# Altium PCB FPGA_DB.PcbDoc (part 4 of 5)
Units mil, origin at the board's own origin, x right, y up, seen from the top; angles counter-clockwise.
Board outline 5980 x 6510 mil, 4 copper layers (Top, Ground Plane, Power Plane, Bottom), stack 61.497 mil thick; 140 components, 246 nets, 1021 pads, 2685 vias.
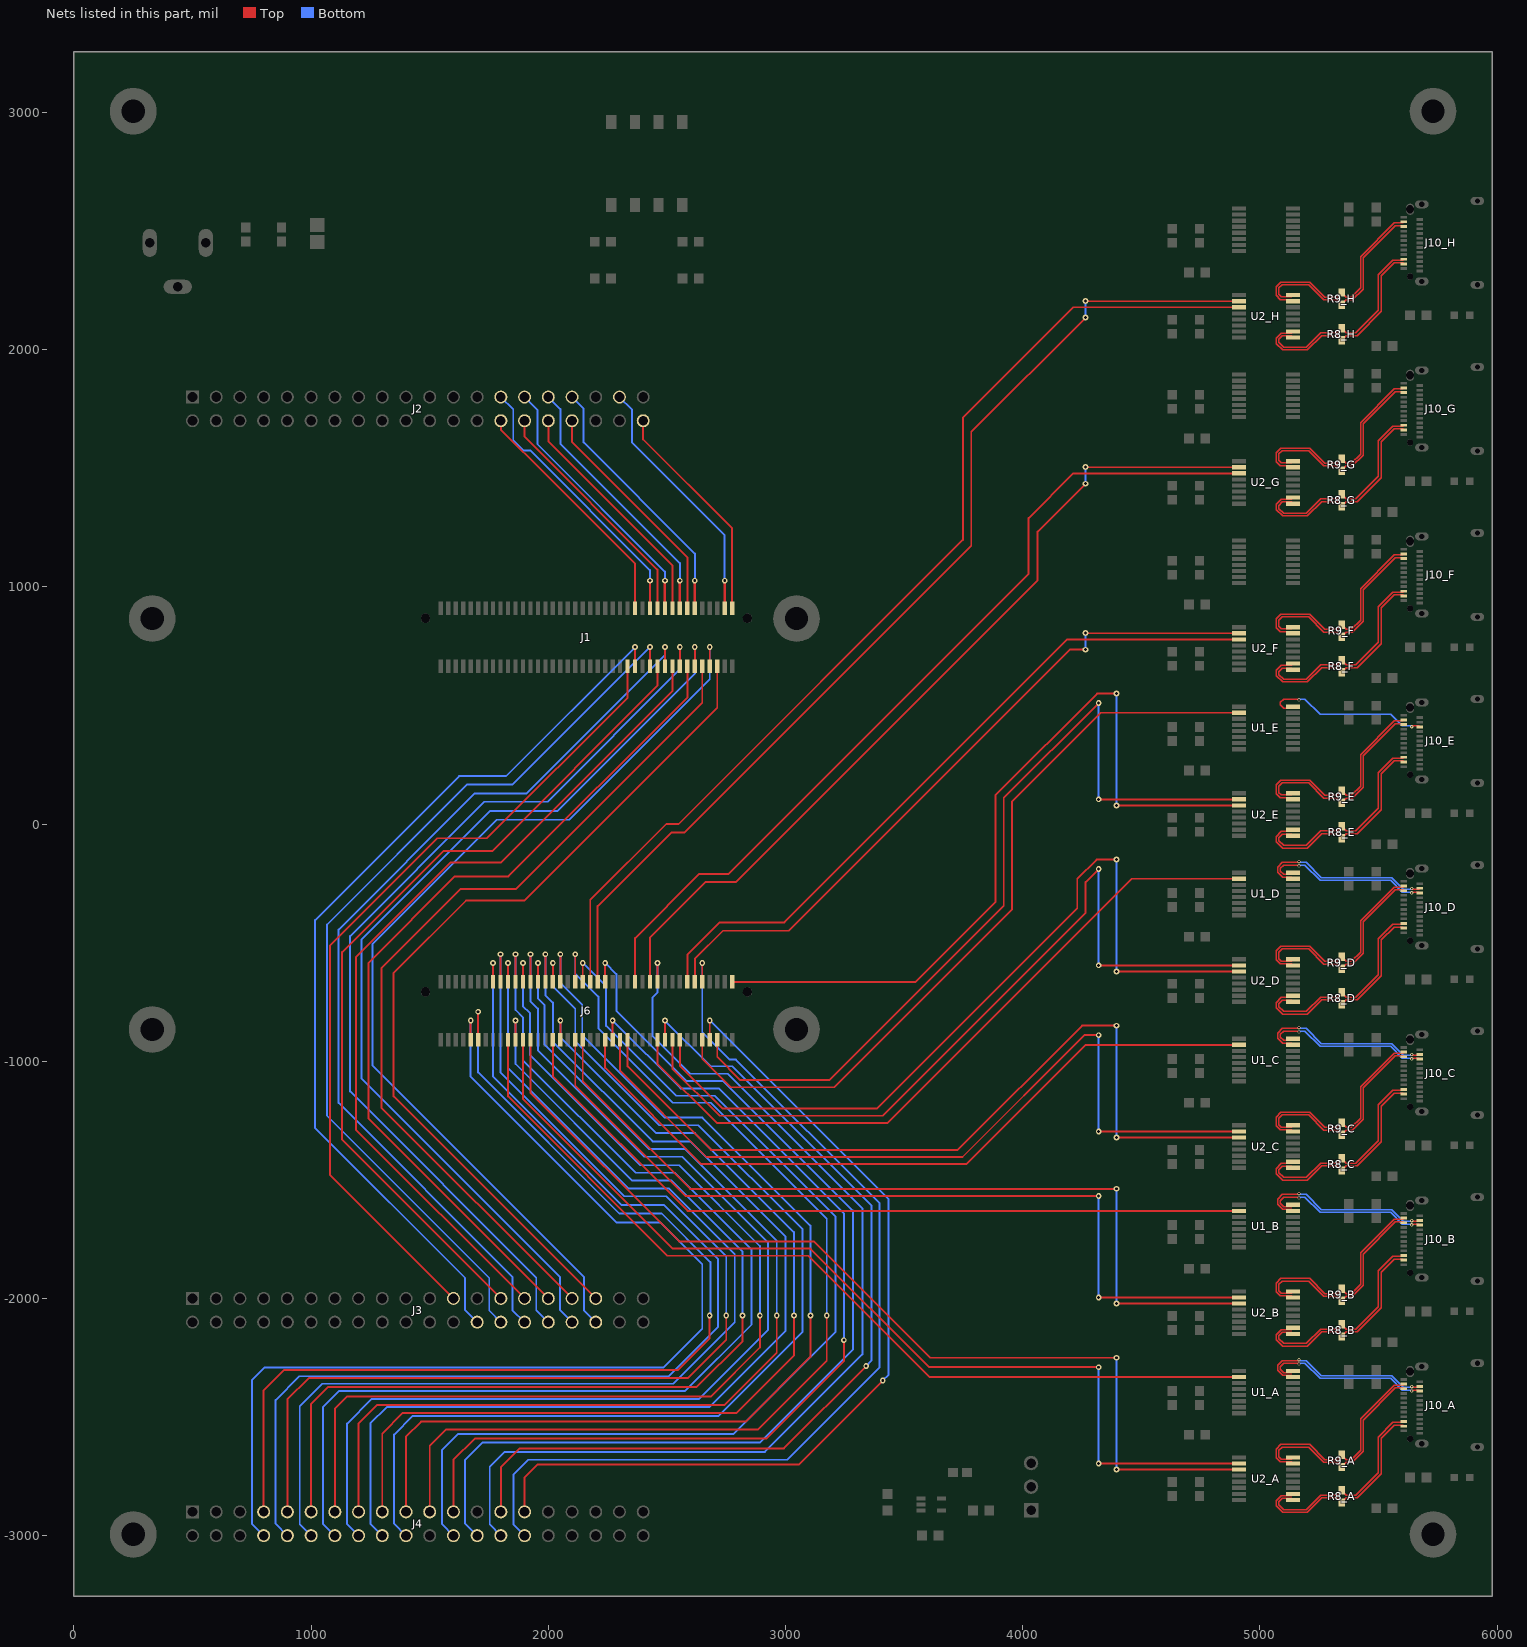
[diagram p6: the nets of this part, all layers, seen from the top]

## Via types
v1: diameter 14, hole 8, Top to Bottom, tented both sides, 2392 vias
v2: diameter 24, hole 12, Top to Bottom, tented both sides, 293 vias

## Nets (pads, with @x,y where several pads share a name; then routed paths per layer and width w, separated by ;. In a path a pad name is that pad's centre, name@x,y a point inside that pad or via, vN(x,y) a via of type N, cw(c..) or ccw(c..) an arc to the next point about the centre after c; other vN are vias at no path point) (continued)
MC1_52: J1.52 J3.23 | length 3523.6
  Top w8: J3.23@1600,-2000 1080,-1480 1080,-511.23 1531.23,-60 1741,-60 2334.13,533.13 J1.52@2334.13,665.83
MC1_53: J1.53 J2.28 | length 1025.5
  Top w8: J2.28@1800,1700 1800,1663 1995,1468 2365.63,1097.37 J1.53@2365.63,908.82
MC1_54: J1.54 J3.26 | length 3883.5
  Top w8: J1.54@2365.63,665.83 v2(2365.63,746)
  Bottom w8: J3.26@1700,-2100 1649,-2049 1649,-1914 1017,-1282 1017,-405 1624,202 1821.63,202 v2(2365.63,746)
MC1_57: J1.57 J2.27 | length 1168.8
  Top w10: J1.57@2428.62,908.82 v2(2428.62,1026)
  Bottom w8: J2.27@1800,1800 1852,1748 1852,1618 1896,1574 1925.36,1574 2428.62,1070.74 v2(2428.62,1026)
MC1_58: J1.58 J3.28 | length 3906
  Top w8: J1.58@2428.62,665.83 v2(2428.62,746)
  Bottom w8: J3.28@1800,-2100 1751,-2051 1751,-1914 1067,-1230 1067,-424 1658,167 1849.62,167 v2(2428.62,746)
MC1_59: J1.59 J2.30 | length 1023.2
  Top w8: J2.30@1900,1700 1900,1633 2460.12,1072.88 J1.59@2460.12,908.82
MC1_60: J1.60 J3.27 | length 3614.1
  Top w8: J3.27@1800,-2000 1131,-1331 1131,-540 1557,-114 1763,-114 2460.12,583.12 J1.60@2460.12,665.83
MC1_61: J1.61 J2.29 | length 1136.2
  Top w10: J1.61@2491.61,908.82 v2(2491.61,1026)
  Bottom w8: J2.29@1900,1800 1954,1746 1954,1602.03 2491.61,1064.42 v2(2491.61,1026)
MC1_62: J1.62 J3.30 | length 3949
  Top w8: J1.62@2491.61,665.83 v2(2491.61,746)
  Bottom w8: J3.30@1900,-2100 1849,-2049 1849,-1909 1116,-1176 1116,-445 1690,129 1909,129 2491.61,711.61 v2(2491.61,746)
MC1_63: J1.63 J2.32 | length 1007.9
  Top w8: J2.32@2000,1700 2000,1614 2523.11,1090.89 J1.63@2523.11,908.82
MC1_64: J1.64 J3.29 | length 3637.7
  Top w8: J3.29@1900,-2000 1189,-1289 1189,-561 1587,-163 1800,-163 2523.11,560.11 J1.64@2523.11,665.83
MC1_65: J1.65 J2.31 | length 1120.9
  Top w10: J1.65@2554.61,908.82 v2(2554.61,1026)
  Bottom w8: J2.31@2000,1800 2050.67,1749.33 2050.67,1603.69 2554.61,1099.75 v2(2554.61,1026)
MC1_66: J1.66 J3.32 | length 4004.5
  Top w8: J1.66@2554.61,665.83 v2(2554.61,746)
  Bottom w8: J3.32@2000,-2100 1949,-2049 1949,-1912 1164,-1127 1164,-472.73 1730.73,94 1997.13,94 2554.61,651.48 v2(2554.61,746)
MC1_67: J1.67 J2.34 | length 992.5
  Top w8: J2.34@2100,1700 2100,1610 2586.1,1123.9 J1.67@2586.1,908.82
MC1_68: J1.68 J3.31 | length 3668.9
  Top w8: J3.31@2000,-2000 1242,-1242 1242,-585 1606,-221 1832,-221 2586.1,533.1 J1.68@2586.1,665.83
MC1_69: J1.69 J2.33 | length 1105.6
  Top w10: J1.69@2617.6,908.82 v2(2617.6,1026)
  Bottom w8: J2.33@2100,1800 2149,1751 2149,1608.36 2617.6,1139.76 v2(2617.6,1026)
MC1_70: J1.70 J3.34 | length 4041.9
  Top w8: J1.70@2617.6,665.83 v2(2617.6,746)
  Bottom w8: J3.34@2100,-2100 2050,-2050 2050,-1910 1213,-1073 1213,-486.73 1754.73,55 2039,55 2617.6,633.6 v2(2617.6,746)
MC1_72: J1.72 J3.33 | length 3695.8
  Top w8: J3.33@2100,-2000 1296,-1196 1296,-609 1631,-274 1864,-274 2649.09,511.09 J1.72@2649.09,665.83
MC1_74: J1.74 J3.36 | length 4084.9
  Top w8: J1.74@2680.59,665.83 v2(2680.59,746)
  Bottom w8: J3.36@2200,-2100 2150,-2050 2150,-1909 1258,-1017 1258,-506 1782,18 2088,18 2680.59,610.59 v2(2680.59,746)
MC1_76: J1.76 J3.35 | length 3727.3
  Top w8: J3.35@2200,-2000 1348,-1148 1348,-628 1653,-323 1898,-323 2712.09,491.09 J1.76@2712.09,665.83
MC1_77: J1.77 J2.37 | length 1074.9
  Top w10: J1.77@2743.58,908.82 v2(2743.58,1026)
  Bottom w8: J2.37@2300,1800 2352,1748 2352,1608.36 2743.58,1216.78 v2(2743.58,1026)
MC1_79: J1.79 J2.40 | length 946.5
  Top w8: J2.40@2400,1700 2400,1621 2775.08,1245.92 J1.79@2775.08,908.82
MC2_10: J4.08 J6.10 | length 4556.8
  Top w8: J6.10@1672.72,-908.98 v2(1672.72,-828.8)
  Bottom w8: J4.08@800,-3000 750,-2950 750,-2345 803,-2292 2485,-2292 2649,-2128 2649,-1856.86 2472.08,-1679.94 2286.95,-1679.94 1672.72,-1065.71 v2(1672.72,-828.8)
MC2_12: J4.07 J6.12 | length 4489
  Top w8: J4.07@800,-2900 800,-2387 886,-2301 2548,-2301 2680,-2169 v2(2680,-2072) ; J6.12@1704.21,-908.98 v2(1704.21,-791.8)
  Bottom w8: v2(1704.21,-791.8) 1704.21,-1047.21 2299.05,-1642.05 2477.8,-1642.05 2683,-1847.26 2683,-2069 v2(2680,-2072)
MC2_15: J4.10 J6.15 | length 4698.1
  Top w8: J6.15@1767.2,-665.98 v2(1767.2,-585.81)
  Bottom w8: J4.10@900,-3000 850,-2950 850,-2429 951,-2328 2508,-2328 2716,-2120 2716,-1834.58 2487.52,-1606.1 2308.25,-1606.1 1767.2,-1065.06 v2(1767.2,-585.81)
MC2_17: J4.09 J6.17 | length 4668.5
  Top w8: J4.09@900,-2900 900,-2426 990,-2336 2588,-2336 2750,-2174 v2(2750,-2072) ; J6.17@1798.7,-665.98 v2(1798.7,-548.81)
  Bottom w8: v2(1798.7,-548.81) 1798.7,-1048.64 2319.44,-1569.37 2496.48,-1569.37 2750,-1822.9 v2(2750,-2072)
MC2_19: J4.12 J6.19 | length 4636.8
  Top w8: J6.19@1830.2,-665.98 v2(1830.2,-585.81)
  Bottom w8: J4.12@1000,-3000 952,-2952 952,-2454 1046,-2360 2527,-2360 2786,-2101 2786,-1814.79 2507.64,-1536.43 2337.94,-1536.43 1830.2,-1028.69 v2(1830.2,-585.81)
MC2_21: J4.14 J6.21 | length 4701.2
  Top w8: J6.21@1861.69,-665.98 v2(1861.69,-548.81)
  Bottom w8: J4.14@1100,-3000 1050,-2950 1050,-2458 1117,-2391 2576,-2391 2857,-2110 2857,-1793.91 2533.5,-1470.4 2368.47,-1470.4 1893.19,-995.13 1893.19,-815.19 1861.69,-783.69 v2(1861.69,-548.81)
MC2_22: J4.11 J6.22 | length 4308.7
  Top w8: J4.11@1000,-2900 1000,-2445 1072,-2373 2626,-2373 2819,-2180 v2(2819,-2072) ; J6.22@1861.69,-908.98 v2(1861.69,-828.8)
  Bottom w8: v2(1861.69,-828.8) 1861.69,-1011.2 2354.14,-1503.65 2519.77,-1503.65 2819,-1802.88 v2(2819,-2072)
MC2_23: J4.13 J6.23 | length 4544.9
  Top w8: J4.13@1100,-2900 1100,-2465 1151,-2414 2685,-2414 2892,-2207 v2(2892,-2072) ; J6.23@1893.19,-665.98 v2(1893.19,-585.81)
  Bottom w8: v2(1893.19,-585.81) 1893.19,-767.88 1922,-796.69 1922,-972.84 2387.86,-1438.7 2551.63,-1438.7 2892,-1779.08 v2(2892,-2072)
MC2_25: J4.16 J6.25 | length 4640
  Top w8: J6.25@1924.69,-665.98 v2(1924.69,-548.81)
  Bottom w8: J4.16@1200,-3000 1152,-2952 1152,-2528 1256,-2424 2636,-2424 2927,-2133 2927,-1765.54 2564.21,-1402.75 2405.47,-1402.75 1956.18,-953.46 1956.18,-778.18 1924.69,-746.69 v2(1924.69,-548.81)
MC2_27: J4.15 J6.27 | length 4489.9
  Top w8: J4.15@1200,-2900 1200,-2527 1278,-2449 2744,-2449 2963,-2230 v2(2963,-2072) ; J6.27@1956.18,-665.98 v2(1956.18,-585.81)
  Bottom w8: v2(1956.18,-585.81) 1956.18,-735.18 1984.63,-763.63 1984.63,-930.39 2424.81,-1370.57 2577.57,-1370.57 2963,-1756 v2(2963,-2072)
MC2_29: J4.18 J6.29 | length 4621.9
  Top w8: J6.29@1987.68,-665.98 v2(1987.68,-548.81)
  Bottom w8: J4.18@1300,-3000 1250,-2950 1250,-2527 1319,-2458 2678,-2458 3000,-2136 3000,-1740 2598,-1338 2440.05,-1338 2019.17,-917.13 2019.17,-753.12 1987.68,-721.62 v2(1987.68,-548.81)
MC2_31: J4.20 J6.31 | length 4516.7
  Top w8: J6.31@2019.17,-665.98 v2(2019.17,-585.81)
  Bottom w8: J4.20@1400,-3000 1350.13,-2950.13 1350.13,-2573.87 1429,-2495 2718,-2495 3072,-2141 3072,-1709 2633,-1270 2467,-1270 2113.66,-916.66 2113.66,-778.78 2019.17,-684.29 v2(2019.17,-585.81)
MC2_33: J4.19 J6.33 | length 4506.4
  Top w8: J4.19@1400,-2900 1400,-2583 1464,-2519 2833,-2519 3105,-2247 v2(3105,-2072) ; J6.33@2050.67,-665.98 v2(2050.67,-548.81)
  Bottom w8: v2(2050.67,-548.81) 2050.67,-668.67 2143,-761 2143,-890 2491,-1238 2650,-1238 3105,-1693 v2(3105,-2072)
MC2_34: J4.17 J6.34 | length 4198
  Top w8: J4.17@1300,-2900 1300,-2570 1387,-2483 2794,-2483 3035.74,-2241.26 v2(3035.74,-2072) ; J6.34@2050.67,-908.98 v2(2050.67,-828.8)
  Bottom w8: v2(2050.67,-828.8) 2050.67,-898.67 2455,-1303 2618,-1303 3035.74,-1720.74 v2(3035.74,-2072)
MC2_37: J4.21 J6.37 | length 4464.5
  Top w8: J4.21@1500,-2900 1500,-2621 1568,-2553 2883,-2553 3174,-2262 v2(3174,-2072) ; J6.37@2113.66,-665.98 v2(2113.66,-548.81)
  Bottom w8: v2(2113.66,-548.81) 2113.66,-630.66 2211,-728 2211,-861.09 2524.91,-1175 2684,-1175 3174,-1665 v2(3174,-2072)
MC2_39: J4.24 J6.39 | length 4417.8
  Top w8: J6.39@2145.16,-665.98 v2(2145.16,-585.81)
  Bottom w8: J4.24@1600,-3000 1552,-2952 1552,-2639 1620,-2571 2781,-2571 3210,-2142 3210,-1654 2701.84,-1145.84 2538.53,-1145.84 2243.54,-850.85 2243.54,-684.19 v2(2145.16,-585.81)
MC2_45: J4.26 J6.45 | length 4401.3
  Top w8: J6.45@2239.65,-665.98 v2(2239.65,-585.81)
  Bottom w8: J4.26@1700,-3000 1649,-2949 1649,-2681 1722,-2608 2892,-2608 3284,-2216 3284,-1630 2738.22,-1084.22 2583.45,-1084.22 2286.95,-787.72 2286.95,-633.11 v2(2239.65,-585.81)
MC2_48: J4.23 J6.48 | length 4051.6
  Top w8: J4.23@1600,-2900 1600,-2681 1690,-2591 2919,-2591 3246,-2264 v2(3246,-2176) ; J6.48@2271.14,-908.98 v2(2271.14,-828.8)
  Bottom w8: v2(2271.14,-828.8) 2557.34,-1115 2719,-1115 3246,-1642 v2(3246,-2176)
MC2_59: J4.28 J6.59 | length 4274.1
  Top w8: J6.59@2460.12,-665.98 v2(2460.12,-585.81)
  Bottom w8: J4.28@1800,-3000 1753,-2953 1753,-2710 1816,-2647 2913,-2647 3324,-2236 3324,-1620 2756.73,-1052.73 2598.86,-1052.73 2440.05,-893.91 2440.05,-730.95 2460.12,-710.88 v2(2460.12,-585.81)
MC2_62: J4.27 J6.62 | length 3864.3
  Top w8: J4.27@1800,-2900 1800,-2712 1880,-2632 2993,-2632 v2(3340,-2285) ; J6.62@2491.61,-908.98 v2(2491.61,-828.8)
  Bottom w8: v2(2491.61,-828.8) 2684.27,-1021.46 2775.46,-1021.46 3362,-1608 3362,-2263 v2(3340,-2285)
MC2_71: J4.30 J6.71 | length 4117.5
  Top w8: J6.71@2649.09,-665.98 v2(2649.09,-585.81)
  Bottom w8: J4.30@1900,-3000 1853,-2953 1853,-2743 1916,-2680 3007,-2680 3397,-2290 3397,-1599.46 2790.52,-992.98 2764.43,-992.98 2649.09,-877.64 v2(2649.09,-585.81)
MC2_74: J4.29 J6.74 | length 3746.5
  Top w8: J4.29@1900,-2900 1900,-2755 1955,-2700 3057,-2700 3410,-2347 v2(3410,-2346) ; J6.74@2680.59,-908.98 v2(2680.59,-828.8)
  Bottom w8: v2(2680.59,-828.8) 2682.8,-828.8 3435,-1581 3435,-2321 v2(3410,-2346)
MISO1_A_N: J10_A.A10 R9_A.1 U2_A.8 | length 878.3
  Top w6.3: U2_A.8@5139.17,-2670.43 5132.03,-2677.58 5090.32,-2677.58 5080,-2667.26 5080,-2640 5093.23,-2626.77 5205.79,-2626.77 5269.67,-2690.65 5325.06,-2690.65 R9_A.1@5345,-2710.59 5364.94,-2690.65 5389.68,-2690.65 5435.39,-2644.95 5435.39,-2583.54 5435.39,-2512.94 5571.42,-2376.91 5602.97,-2376.91 J10_A.A10@5607.17,-2381.1
MISO1_A_P: J10_A.A11 R9_A.2 U2_A.7 | length 915.8
  Top w6.3: U2_A.7@5139.17,-2696.02 5132.03,-2688.88 5085.64,-2688.88 5068.7,-2671.94 5068.7,-2635.32 5088.55,-2615.47 5210.47,-2615.47 5274.35,-2679.35 5325.06,-2679.35 R9_A.2@5345,-2659.41 5364.94,-2679.35 5385,-2679.35 5424.08,-2640.26 5424.08,-2578.86 5424.08,-2508.26 5566.74,-2365.61 5602.97,-2365.61 J10_A.A11@5607.17,-2361.42
MISO1_B_N: J10_B.A10 R9_B.1 U2_B.8 | length 1756.6
  Top w6.3: 5080,-1967.26 5090.32,-1977.58 ; 5080,-1967.26 5080,-1940 ; 5080,-1967.26 5080,-1940 ; 5080,-1967.26 5090.32,-1977.58 ; 5080,-1940 5093.23,-1926.77 ; 5080,-1940 5093.23,-1926.77 ; 5090.32,-1977.58 U2_B.8@5132.03,-1977.58 ; 5090.32,-1977.58 U2_B.8@5132.03,-1977.58 ; 5093.23,-1926.77 5205.79,-1926.77 ; 5093.23,-1926.77 5205.79,-1926.77 ; U2_B.8@5132.03,-1977.58 U2_B.8@5139.17,-1970.43 U2_B.8@5132.03,-1977.58 ; 5205.79,-1926.77 5269.67,-1990.65 ; 5205.79,-1926.77 5269.67,-1990.65 ; 5269.67,-1990.65 5325.06,-1990.65 ; 5269.67,-1990.65 5325.06,-1990.65 ; 5325.06,-1990.65 R9_B.1@5345,-2010.59 ; 5325.06,-1990.65 R9_B.1@5345,-2010.59 ; R9_B.1@5345,-2010.59 5364.94,-1990.65 ; R9_B.1@5345,-2010.59 5364.94,-1990.65 ; 5364.94,-1990.65 5389.68,-1990.65 ; 5364.94,-1990.65 5389.68,-1990.65 ; 5389.68,-1990.65 5435.39,-1944.95 ; 5389.68,-1990.65 5435.39,-1944.95 ; 5435.39,-1944.95 5435.39,-1883.54 ; 5435.39,-1944.95 5435.39,-1883.54 ; 5435.39,-1883.54 5435.39,-1812.94 ; 5435.39,-1883.54 5435.39,-1812.94 ; 5435.39,-1812.94 5571.42,-1676.91 ; 5435.39,-1812.94 5571.42,-1676.91 ; 5571.42,-1676.91 J10_B.A10@5602.97,-1676.91 ; 5571.42,-1676.91 J10_B.A10@5602.97,-1676.91 ; J10_B.A10@5602.97,-1676.91 J10_B.A10@5607.17,-1681.1 J10_B.A10@5602.97,-1676.91
MISO1_B_P: J10_B.A11 R9_B.2 U2_B.7 | length 1831.5
  Top w6.3: 5068.7,-1971.94 5085.64,-1988.88 ; 5068.7,-1971.94 5068.7,-1935.32 ; 5068.7,-1971.94 5068.7,-1935.32 ; 5068.7,-1971.94 5085.64,-1988.88 ; 5068.7,-1935.32 5088.55,-1915.47 ; 5068.7,-1935.32 5088.55,-1915.47 ; 5085.64,-1988.88 U2_B.7@5132.03,-1988.88 ; 5085.64,-1988.88 U2_B.7@5132.03,-1988.88 ; 5088.55,-1915.47 5210.47,-1915.47 ; 5088.55,-1915.47 5210.47,-1915.47 ; U2_B.7@5132.03,-1988.88 U2_B.7@5139.17,-1996.02 U2_B.7@5132.03,-1988.88 ; 5210.47,-1915.47 5274.35,-1979.35 ; 5210.47,-1915.47 5274.35,-1979.35 ; 5274.35,-1979.35 5325.06,-1979.35 ; 5274.35,-1979.35 5325.06,-1979.35 ; 5325.06,-1979.35 R9_B.2@5345,-1959.41 ; 5325.06,-1979.35 R9_B.2@5345,-1959.41 ; R9_B.2@5345,-1959.41 5364.94,-1979.35 ; R9_B.2@5345,-1959.41 5364.94,-1979.35 ; 5364.94,-1979.35 5385,-1979.35 ; 5364.94,-1979.35 5385,-1979.35 ; 5385,-1979.35 5424.08,-1940.26 ; 5385,-1979.35 5424.08,-1940.26 ; 5424.08,-1940.26 5424.08,-1878.86 ; 5424.08,-1940.26 5424.08,-1878.86 ; 5424.08,-1878.86 5424.08,-1808.26 ; 5424.08,-1878.86 5424.08,-1808.26 ; 5424.08,-1808.26 5566.74,-1665.61 ; 5424.08,-1808.26 5566.74,-1665.61 ; 5566.74,-1665.61 J10_B.A11@5602.97,-1665.61 ; 5566.74,-1665.61 J10_B.A11@5602.97,-1665.61 ; J10_B.A11@5602.97,-1665.61 J10_B.A11@5607.17,-1661.42 J10_B.A11@5602.97,-1665.61
MISO1_C_N: J10_C.A10 R9_C.1 U2_C.8 | length 1756.6
  Top w6.3: 5080,-1267.26 5090.32,-1277.58 ; 5080,-1267.26 5080,-1240 ; 5080,-1267.26 5090.32,-1277.58 ; 5080,-1267.26 5080,-1240 ; 5080,-1240 5093.23,-1226.77 ; 5080,-1240 5093.23,-1226.77 ; 5090.32,-1277.58 U2_C.8@5132.03,-1277.58 ; 5090.32,-1277.58 U2_C.8@5132.03,-1277.58 ; 5093.23,-1226.77 5205.79,-1226.77 ; 5093.23,-1226.77 5205.79,-1226.77 ; U2_C.8@5132.03,-1277.58 U2_C.8@5139.17,-1270.43 U2_C.8@5132.03,-1277.58 ; 5205.79,-1226.77 5269.67,-1290.65 ; 5205.79,-1226.77 5269.67,-1290.65 ; 5269.67,-1290.65 5325.06,-1290.65 ; 5269.67,-1290.65 5325.06,-1290.65 ; 5325.06,-1290.65 R9_C.1@5345,-1310.59 ; 5325.06,-1290.65 R9_C.1@5345,-1310.59 ; R9_C.1@5345,-1310.59 5364.94,-1290.65 ; R9_C.1@5345,-1310.59 5364.94,-1290.65 ; 5364.94,-1290.65 5389.68,-1290.65 ; 5364.94,-1290.65 5389.68,-1290.65 ; 5389.68,-1290.65 5435.39,-1244.95 ; 5389.68,-1290.65 5435.39,-1244.95 ; 5435.39,-1244.95 5435.39,-1183.54 ; 5435.39,-1244.95 5435.39,-1183.54 ; 5435.39,-1183.54 5435.39,-1112.94 ; 5435.39,-1183.54 5435.39,-1112.94 ; 5435.39,-1112.94 5571.42,-976.91 ; 5435.39,-1112.94 5571.42,-976.91 ; 5571.42,-976.91 J10_C.A10@5602.97,-976.91 ; 5571.42,-976.91 J10_C.A10@5602.97,-976.91 ; J10_C.A10@5602.97,-976.91 J10_C.A10@5607.17,-981.1 J10_C.A10@5602.97,-976.91
MISO1_C_P: J10_C.A11 R9_C.2 U2_C.7 | length 1831.5
  Top w6.3: 5068.7,-1271.94 5085.64,-1288.88 ; 5068.7,-1271.94 5068.7,-1235.32 ; 5068.7,-1271.94 5085.64,-1288.88 ; 5068.7,-1271.94 5068.7,-1235.32 ; 5068.7,-1235.32 5088.55,-1215.47 ; 5068.7,-1235.32 5088.55,-1215.47 ; 5085.64,-1288.88 U2_C.7@5132.03,-1288.88 ; 5085.64,-1288.88 U2_C.7@5132.03,-1288.88 ; 5088.55,-1215.47 5210.47,-1215.47 ; 5088.55,-1215.47 5210.47,-1215.47 ; U2_C.7@5132.03,-1288.88 U2_C.7@5139.17,-1296.02 U2_C.7@5132.03,-1288.88 ; 5210.47,-1215.47 5274.35,-1279.35 ; 5210.47,-1215.47 5274.35,-1279.35 ; 5274.35,-1279.35 5325.06,-1279.35 ; 5274.35,-1279.35 5325.06,-1279.35 ; 5325.06,-1279.35 R9_C.2@5345,-1259.41 ; 5325.06,-1279.35 R9_C.2@5345,-1259.41 ; R9_C.2@5345,-1259.41 5364.94,-1279.35 ; R9_C.2@5345,-1259.41 5364.94,-1279.35 ; 5364.94,-1279.35 5385,-1279.35 ; 5364.94,-1279.35 5385,-1279.35 ; 5385,-1279.35 5424.08,-1240.26 ; 5385,-1279.35 5424.08,-1240.26 ; 5424.08,-1240.26 5424.08,-1178.86 ; 5424.08,-1240.26 5424.08,-1178.86 ; 5424.08,-1178.86 5424.08,-1108.26 ; 5424.08,-1178.86 5424.08,-1108.26 ; 5424.08,-1108.26 5566.74,-965.61 ; 5424.08,-1108.26 5566.74,-965.61 ; 5566.74,-965.61 J10_C.A11@5602.97,-965.61 ; 5566.74,-965.61 J10_C.A11@5602.97,-965.61 ; J10_C.A11@5602.97,-965.61 J10_C.A11@5607.17,-961.42 J10_C.A11@5602.97,-965.61
MISO1_D_N: J10_D.A10 R9_D.1 U2_D.8 | length 1756.6
  Top w6.3: 5080,-567.26 5090.32,-577.58 ; 5080,-567.26 5080,-540 ; 5080,-567.26 5090.32,-577.58 ; 5080,-567.26 5080,-540 ; 5080,-540 5093.23,-526.77 ; 5080,-540 5093.23,-526.77 ; 5090.32,-577.58 U2_D.8@5132.03,-577.58 ; 5090.32,-577.58 U2_D.8@5132.03,-577.58 ; 5093.23,-526.77 5205.79,-526.77 ; 5093.23,-526.77 5205.79,-526.77 ; U2_D.8@5132.03,-577.58 U2_D.8@5139.17,-570.43 U2_D.8@5132.03,-577.58 ; 5205.79,-526.77 5269.67,-590.65 ; 5205.79,-526.77 5269.67,-590.65 ; 5269.67,-590.65 5325.06,-590.65 ; 5269.67,-590.65 5325.06,-590.65 ; 5325.06,-590.65 R9_D.1@5345,-610.59 ; 5325.06,-590.65 R9_D.1@5345,-610.59 ; R9_D.1@5345,-610.59 5364.94,-590.65 ; R9_D.1@5345,-610.59 5364.94,-590.65 ; 5364.94,-590.65 5389.68,-590.65 ; 5364.94,-590.65 5389.68,-590.65 ; 5389.68,-590.65 5435.39,-544.95 ; 5389.68,-590.65 5435.39,-544.95 ; 5435.39,-544.95 5435.39,-483.54 ; 5435.39,-544.95 5435.39,-483.54 ; 5435.39,-483.54 5435.39,-412.94 ; 5435.39,-483.54 5435.39,-412.94 ; 5435.39,-412.94 5571.42,-276.91 ; 5435.39,-412.94 5571.42,-276.91 ; 5571.42,-276.91 J10_D.A10@5602.97,-276.91 ; 5571.42,-276.91 J10_D.A10@5602.97,-276.91 ; J10_D.A10@5602.97,-276.91 J10_D.A10@5607.17,-281.1 J10_D.A10@5602.97,-276.91
MISO1_D_P: J10_D.A11 R9_D.2 U2_D.7 | length 1831.5
  Top w6.3: 5068.7,-571.94 5085.64,-588.88 ; 5068.7,-571.94 5068.7,-535.32 ; 5068.7,-571.94 5085.64,-588.88 ; 5068.7,-571.94 5068.7,-535.32 ; 5068.7,-535.32 5088.55,-515.47 ; 5068.7,-535.32 5088.55,-515.47 ; 5085.64,-588.88 U2_D.7@5132.03,-588.88 ; 5085.64,-588.88 U2_D.7@5132.03,-588.88 ; 5088.55,-515.47 5210.47,-515.47 ; 5088.55,-515.47 5210.47,-515.47 ; U2_D.7@5132.03,-588.88 U2_D.7@5139.17,-596.02 U2_D.7@5132.03,-588.88 ; 5210.47,-515.47 5274.35,-579.35 ; 5210.47,-515.47 5274.35,-579.35 ; 5274.35,-579.35 5325.06,-579.35 ; 5274.35,-579.35 5325.06,-579.35 ; 5325.06,-579.35 R9_D.2@5345,-559.41 ; 5325.06,-579.35 R9_D.2@5345,-559.41 ; R9_D.2@5345,-559.41 5364.94,-579.35 ; R9_D.2@5345,-559.41 5364.94,-579.35 ; 5364.94,-579.35 5385,-579.35 ; 5364.94,-579.35 5385,-579.35 ; 5385,-579.35 5424.08,-540.26 ; 5385,-579.35 5424.08,-540.26 ; 5424.08,-540.26 5424.08,-478.86 ; 5424.08,-540.26 5424.08,-478.86 ; 5424.08,-478.86 5424.08,-408.26 ; 5424.08,-478.86 5424.08,-408.26 ; 5424.08,-408.26 5566.74,-265.61 ; 5424.08,-408.26 5566.74,-265.61 ; 5566.74,-265.61 J10_D.A11@5602.97,-265.61 ; 5566.74,-265.61 J10_D.A11@5602.97,-265.61 ; J10_D.A11@5602.97,-265.61 J10_D.A11@5607.17,-261.42 J10_D.A11@5602.97,-265.61
MISO1_E_N: J10_E.A10 R9_E.1 U2_E.8 | length 1756.6
  Top w6.3: 5080,132.74 5090.32,122.42 ; 5080,132.74 5080,160 ; 5080,132.74 5090.32,122.42 ; 5080,132.74 5080,160 ; 5080,160 5093.23,173.23 ; 5080,160 5093.23,173.23 ; 5090.32,122.42 U2_E.8@5132.03,122.42 ; 5090.32,122.42 U2_E.8@5132.03,122.42 ; 5093.23,173.23 5205.79,173.23 ; 5093.23,173.23 5205.79,173.23 ; U2_E.8@5132.03,122.42 U2_E.8@5139.17,129.57 U2_E.8@5132.03,122.42 ; 5205.79,173.23 5269.67,109.35 ; 5205.79,173.23 5269.67,109.35 ; 5269.67,109.35 5325.06,109.35 ; 5269.67,109.35 5325.06,109.35 ; 5325.06,109.35 R9_E.1@5345,89.41 ; 5325.06,109.35 R9_E.1@5345,89.41 ; R9_E.1@5345,89.41 5364.94,109.35 ; R9_E.1@5345,89.41 5364.94,109.35 ; 5364.94,109.35 5389.68,109.35 ; 5364.94,109.35 5389.68,109.35 ; 5389.68,109.35 5435.39,155.05 ; 5389.68,109.35 5435.39,155.05 ; 5435.39,155.05 5435.39,216.46 ; 5435.39,155.05 5435.39,216.46 ; 5435.39,216.46 5435.39,287.06 ; 5435.39,216.46 5435.39,287.06 ; 5435.39,287.06 5571.42,423.09 ; 5435.39,287.06 5571.42,423.09 ; 5571.42,423.09 J10_E.A10@5602.97,423.09 ; 5571.42,423.09 J10_E.A10@5602.97,423.09 ; J10_E.A10@5602.97,423.09 J10_E.A10@5607.17,418.9 J10_E.A10@5602.97,423.09
MISO1_E_P: J10_E.A11 R9_E.2 U2_E.7 | length 1831.5
  Top w6.3: 5068.7,128.06 5085.64,111.12 ; 5068.7,128.06 5068.7,164.68 ; 5068.7,128.06 5085.64,111.12 ; 5068.7,128.06 5068.7,164.68 ; 5068.7,164.68 5088.55,184.53 ; 5068.7,164.68 5088.55,184.53 ; 5085.64,111.12 U2_E.7@5132.03,111.12 ; 5085.64,111.12 U2_E.7@5132.03,111.12 ; 5088.55,184.53 5210.47,184.53 ; 5088.55,184.53 5210.47,184.53 ; U2_E.7@5132.03,111.12 U2_E.7@5139.17,103.98 U2_E.7@5132.03,111.12 ; 5210.47,184.53 5274.35,120.65 ; 5210.47,184.53 5274.35,120.65 ; 5274.35,120.65 5325.06,120.65 ; 5274.35,120.65 5325.06,120.65 ; 5325.06,120.65 R9_E.2@5345,140.59 ; 5325.06,120.65 R9_E.2@5345,140.59 ; R9_E.2@5345,140.59 5364.94,120.65 ; R9_E.2@5345,140.59 5364.94,120.65 ; 5364.94,120.65 5385,120.65 ; 5364.94,120.65 5385,120.65 ; 5385,120.65 5424.08,159.74 ; 5385,120.65 5424.08,159.74 ; 5424.08,159.74 5424.08,221.14 ; 5424.08,159.74 5424.08,221.14 ; 5424.08,221.14 5424.08,291.74 ; 5424.08,221.14 5424.08,291.74 ; 5424.08,291.74 5566.74,434.39 ; 5424.08,291.74 5566.74,434.39 ; 5566.74,434.39 J10_E.A11@5602.97,434.39 ; 5566.74,434.39 J10_E.A11@5602.97,434.39 ; J10_E.A11@5602.97,434.39 J10_E.A11@5607.17,438.58 J10_E.A11@5602.97,434.39
MISO1_F_N: J10_F.A10 R9_F.1 U2_F.8 | length 878.3
  Top w6.3: U2_F.8@5139.17,829.57 5132.03,822.42 5090.32,822.42 5080,832.74 5080,860 5093.23,873.23 5205.79,873.23 5269.67,809.35 5325.06,809.35 R9_F.1@5345,789.41 5364.94,809.35 5389.68,809.35 5435.39,855.05 5435.39,916.46 5435.39,987.06 5571.42,1123.09 5602.97,1123.09 J10_F.A10@5607.17,1118.9
MISO1_F_P: J10_F.A11 R9_F.2 U2_F.7 | length 915.8
  Top w6.3: U2_F.7@5139.17,803.98 5132.03,811.12 5085.64,811.12 5068.7,828.06 5068.7,864.68 5088.55,884.53 5210.47,884.53 5274.35,820.65 5325.06,820.65 R9_F.2@5345,840.59 5364.94,820.65 5385,820.65 5424.08,859.74 5424.08,921.14 5424.08,991.74 5566.74,1134.39 5602.97,1134.39 J10_F.A11@5607.17,1138.58
MISO1_G_N: J10_G.A10 R9_G.1 U2_G.8 | length 878.3
  Top w6.3: U2_G.8@5139.17,1529.57 5132.03,1522.42 5090.32,1522.42 5080,1532.74 5080,1560 5093.23,1573.23 5205.79,1573.23 5269.67,1509.35 5325.06,1509.35 R9_G.1@5345,1489.41 5364.94,1509.35 5389.68,1509.35 5435.39,1555.05 5435.39,1616.46 5435.39,1687.06 5571.42,1823.09 5602.97,1823.09 J10_G.A10@5607.17,1818.9
MISO1_G_P: J10_G.A11 R9_G.2 U2_G.7 | length 915.8
  Top w6.3: U2_G.7@5139.17,1503.98 5132.03,1511.12 5085.64,1511.12 5068.7,1528.06 5068.7,1564.68 5088.55,1584.53 5210.47,1584.53 5274.35,1520.65 5325.06,1520.65 R9_G.2@5345,1540.59 5364.94,1520.65 5385,1520.65 5424.08,1559.74 5424.08,1621.14 5424.08,1691.74 5566.74,1834.39 5602.97,1834.39 J10_G.A11@5607.17,1838.58
MISO1_H_N: J10_H.A10 R9_H.1 U2_H.8 | length 878.3
  Top w6.3: U2_H.8@5139.17,2229.57 5132.03,2222.42 5090.32,2222.42 5080,2232.74 5080,2260 5093.23,2273.23 5205.79,2273.23 5269.67,2209.35 5325.06,2209.35 R9_H.1@5345,2189.41 5364.94,2209.35 5389.68,2209.35 5435.39,2255.05 5435.39,2316.46 5435.39,2387.06 5571.42,2523.09 5602.97,2523.09 J10_H.A10@5607.17,2518.9
MISO1_H_P: J10_H.A11 R9_H.2 U2_H.7 | length 915.8
  Top w6.3: U2_H.7@5139.17,2203.98 5132.03,2211.12 5085.64,2211.12 5068.7,2228.06 5068.7,2264.68 5088.55,2284.53 5210.47,2284.53 5274.35,2220.65 5325.06,2220.65 R9_H.2@5345,2240.59 5364.94,2220.65 5385,2220.65 5424.08,2259.74 5424.08,2321.14 5424.08,2391.74 5566.74,2534.39 5602.97,2534.39 J10_H.A11@5607.17,2538.58
MISO2_A_N: J10_A.A3 R8_A.1 U2_A.1 | length 874.6
  Top w6.3: U2_A.1@5139.17,-2849.57 5132.03,-2842.42 5095,-2842.42 5080,-2857.42 5080,-2870 5100,-2890 5195,-2890 5255.65,-2829.35 5325.06,-2829.35 R8_A.1@5345,-2809.41 5364.94,-2829.35 5404.94,-2829.35 5499.71,-2734.58 5499.71,-2584.3 5560.93,-2523.09 5602.97,-2523.09 J10_A.A3@5607.17,-2518.9
MISO2_A_P: J10_A.A2 R8_A.2 U2_A.2 | length 912.1
  Top w6.3: U2_A.2@5139.17,-2823.98 5132.03,-2831.12 5090.32,-2831.12 5068.7,-2852.74 5068.7,-2874.68 5095.32,-2901.3 5199.68,-2901.3 5260.33,-2840.65 5325.06,-2840.65 R8_A.2@5345,-2860.59 5364.94,-2840.65 5409.62,-2840.65 5511.01,-2739.26 5511.01,-2588.99 5565.61,-2534.39 5602.97,-2534.39 J10_A.A2@5607.17,-2538.58
MISO2_B_N: J10_B.A3 R8_B.1 U2_B.1 | length 1749.3
  Top w6.3: 5080,-2170 5080,-2157.42 ; 5080,-2170 5100,-2190 ; 5080,-2170 5100,-2190 ; 5080,-2170 5080,-2157.42 ; 5080,-2157.42 5095,-2142.42 ; 5080,-2157.42 5095,-2142.42 ; 5095,-2142.42 U2_B.1@5132.03,-2142.42 ; 5095,-2142.42 U2_B.1@5132.03,-2142.42 ; 5100,-2190 5195,-2190 ; 5100,-2190 5195,-2190 ; U2_B.1@5132.03,-2142.42 U2_B.1@5139.17,-2149.57 U2_B.1@5132.03,-2142.42 ; 5195,-2190 5255.65,-2129.35 ; 5195,-2190 5255.65,-2129.35 ; 5255.65,-2129.35 5325.06,-2129.35 ; 5255.65,-2129.35 5325.06,-2129.35 ; 5325.06,-2129.35 R8_B.1@5345,-2109.41 ; 5325.06,-2129.35 R8_B.1@5345,-2109.41 ; R8_B.1@5345,-2109.41 5364.94,-2129.35 ; R8_B.1@5345,-2109.41 5364.94,-2129.35 ; 5364.94,-2129.35 5404.94,-2129.35 ; 5364.94,-2129.35 5404.94,-2129.35 ; 5404.94,-2129.35 5499.71,-2034.58 ; 5404.94,-2129.35 5499.71,-2034.58 ; 5499.71,-2034.58 5499.71,-1884.3 ; 5499.71,-2034.58 5499.71,-1884.3 ; 5499.71,-1884.3 5560.93,-1823.09 ; 5499.71,-1884.3 5560.93,-1823.09 ; 5560.93,-1823.09 J10_B.A3@5602.97,-1823.09 ; 5560.93,-1823.09 J10_B.A3@5602.97,-1823.09 ; J10_B.A3@5602.97,-1823.09 J10_B.A3@5607.17,-1818.9 J10_B.A3@5602.97,-1823.09
MISO2_B_P: J10_B.A2 R8_B.2 U2_B.2 | length 1824.2
  Top w6.3: 5068.7,-2174.68 5068.7,-2152.74 ; 5068.7,-2174.68 5095.32,-2201.3 ; 5068.7,-2174.68 5095.32,-2201.3 ; 5068.7,-2174.68 5068.7,-2152.74 ; 5068.7,-2152.74 5090.32,-2131.12 ; 5068.7,-2152.74 5090.32,-2131.12 ; 5090.32,-2131.12 U2_B.2@5132.03,-2131.12 ; 5090.32,-2131.12 U2_B.2@5132.03,-2131.12 ; 5095.32,-2201.3 5199.68,-2201.3 ; 5095.32,-2201.3 5199.68,-2201.3 ; U2_B.2@5132.03,-2131.12 U2_B.2@5139.17,-2123.98 U2_B.2@5132.03,-2131.12 ; 5199.68,-2201.3 5260.33,-2140.65 ; 5199.68,-2201.3 5260.33,-2140.65 ; 5260.33,-2140.65 5325.06,-2140.65 ; 5260.33,-2140.65 5325.06,-2140.65 ; 5325.06,-2140.65 R8_B.2@5345,-2160.59 ; 5325.06,-2140.65 R8_B.2@5345,-2160.59 ; R8_B.2@5345,-2160.59 5364.94,-2140.65 ; R8_B.2@5345,-2160.59 5364.94,-2140.65 ; 5364.94,-2140.65 5409.62,-2140.65 ; 5364.94,-2140.65 5409.62,-2140.65 ; 5409.62,-2140.65 5511.01,-2039.26 ; 5409.62,-2140.65 5511.01,-2039.26 ; 5511.01,-2039.26 5511.01,-1888.99 ; 5511.01,-2039.26 5511.01,-1888.99 ; 5511.01,-1888.99 5565.61,-1834.39 ; 5511.01,-1888.99 5565.61,-1834.39 ; 5565.61,-1834.39 J10_B.A2@5602.97,-1834.39 ; 5565.61,-1834.39 J10_B.A2@5602.97,-1834.39 ; J10_B.A2@5602.97,-1834.39 J10_B.A2@5607.17,-1838.58 J10_B.A2@5602.97,-1834.39
MISO2_C_N: J10_C.A3 R8_C.1 U2_C.1 | length 1749.3
  Top w6.3: 5080,-1470 5080,-1457.42 ; 5080,-1470 5100,-1490 ; 5080,-1470 5080,-1457.42 ; 5080,-1470 5100,-1490 ; 5080,-1457.42 5095,-1442.42 ; 5080,-1457.42 5095,-1442.42 ; 5095,-1442.42 U2_C.1@5132.03,-1442.42 ; 5095,-1442.42 U2_C.1@5132.03,-1442.42 ; 5100,-1490 5195,-1490 ; 5100,-1490 5195,-1490 ; U2_C.1@5132.03,-1442.42 U2_C.1@5139.17,-1449.57 U2_C.1@5132.03,-1442.42 ; 5195,-1490 5255.65,-1429.35 ; 5195,-1490 5255.65,-1429.35 ; 5255.65,-1429.35 5325.06,-1429.35 ; 5255.65,-1429.35 5325.06,-1429.35 ; 5325.06,-1429.35 R8_C.1@5345,-1409.41 ; 5325.06,-1429.35 R8_C.1@5345,-1409.41 ; R8_C.1@5345,-1409.41 5364.94,-1429.35 ; R8_C.1@5345,-1409.41 5364.94,-1429.35 ; 5364.94,-1429.35 5404.94,-1429.35 ; 5364.94,-1429.35 5404.94,-1429.35 ; 5404.94,-1429.35 5499.71,-1334.58 ; 5404.94,-1429.35 5499.71,-1334.58 ; 5499.71,-1334.58 5499.71,-1184.3 ; 5499.71,-1334.58 5499.71,-1184.3 ; 5499.71,-1184.3 5560.93,-1123.09 ; 5499.71,-1184.3 5560.93,-1123.09 ; 5560.93,-1123.09 J10_C.A3@5602.97,-1123.09 ; 5560.93,-1123.09 J10_C.A3@5602.97,-1123.09 ; J10_C.A3@5602.97,-1123.09 J10_C.A3@5607.17,-1118.9 J10_C.A3@5602.97,-1123.09
MISO2_C_P: J10_C.A2 R8_C.2 U2_C.2 | length 1824.2
  Top w6.3: 5068.7,-1474.68 5068.7,-1452.74 ; 5068.7,-1474.68 5095.32,-1501.3 ; 5068.7,-1474.68 5068.7,-1452.74 ; 5068.7,-1474.68 5095.32,-1501.3 ; 5068.7,-1452.74 5090.32,-1431.12 ; 5068.7,-1452.74 5090.32,-1431.12 ; 5090.32,-1431.12 U2_C.2@5132.03,-1431.12 ; 5090.32,-1431.12 U2_C.2@5132.03,-1431.12 ; 5095.32,-1501.3 5199.68,-1501.3 ; 5095.32,-1501.3 5199.68,-1501.3 ; U2_C.2@5132.03,-1431.12 U2_C.2@5139.17,-1423.98 U2_C.2@5132.03,-1431.12 ; 5199.68,-1501.3 5260.33,-1440.65 ; 5199.68,-1501.3 5260.33,-1440.65 ; 5260.33,-1440.65 5325.06,-1440.65 ; 5260.33,-1440.65 5325.06,-1440.65 ; 5325.06,-1440.65 R8_C.2@5345,-1460.59 ; 5325.06,-1440.65 R8_C.2@5345,-1460.59 ; R8_C.2@5345,-1460.59 5364.94,-1440.65 ; R8_C.2@5345,-1460.59 5364.94,-1440.65 ; 5364.94,-1440.65 5409.62,-1440.65 ; 5364.94,-1440.65 5409.62,-1440.65 ; 5409.62,-1440.65 5511.01,-1339.26 ; 5409.62,-1440.65 5511.01,-1339.26 ; 5511.01,-1339.26 5511.01,-1188.99 ; 5511.01,-1339.26 5511.01,-1188.99 ; 5511.01,-1188.99 5565.61,-1134.39 ; 5511.01,-1188.99 5565.61,-1134.39 ; 5565.61,-1134.39 J10_C.A2@5602.97,-1134.39 ; 5565.61,-1134.39 J10_C.A2@5602.97,-1134.39 ; J10_C.A2@5602.97,-1134.39 J10_C.A2@5607.17,-1138.58 J10_C.A2@5602.97,-1134.39
MISO2_D_N: J10_D.A3 R8_D.1 U2_D.1 | length 1749.3
  Top w6.3: 5080,-770 5080,-757.42 ; 5080,-770 5100,-790 ; 5080,-770 5080,-757.42 ; 5080,-770 5100,-790 ; 5080,-757.42 5095,-742.42 ; 5080,-757.42 5095,-742.42 ; 5095,-742.42 U2_D.1@5132.03,-742.42 ; 5095,-742.42 U2_D.1@5132.03,-742.42 ; 5100,-790 5195,-790 ; 5100,-790 5195,-790 ; U2_D.1@5132.03,-742.42 U2_D.1@5139.17,-749.57 U2_D.1@5132.03,-742.42 ; 5195,-790 5255.65,-729.35 ; 5195,-790 5255.65,-729.35 ; 5255.65,-729.35 5325.06,-729.35 ; 5255.65,-729.35 5325.06,-729.35 ; 5325.06,-729.35 R8_D.1@5345,-709.41 ; 5325.06,-729.35 R8_D.1@5345,-709.41 ; R8_D.1@5345,-709.41 5364.94,-729.35 ; R8_D.1@5345,-709.41 5364.94,-729.35 ; 5364.94,-729.35 5404.94,-729.35 ; 5364.94,-729.35 5404.94,-729.35 ; 5404.94,-729.35 5499.71,-634.58 ; 5404.94,-729.35 5499.71,-634.58 ; 5499.71,-634.58 5499.71,-484.3 ; 5499.71,-634.58 5499.71,-484.3 ; 5499.71,-484.3 5560.93,-423.09 ; 5499.71,-484.3 5560.93,-423.09 ; 5560.93,-423.09 J10_D.A3@5602.97,-423.09 ; 5560.93,-423.09 J10_D.A3@5602.97,-423.09 ; J10_D.A3@5602.97,-423.09 J10_D.A3@5607.17,-418.9 J10_D.A3@5602.97,-423.09
MISO2_D_P: J10_D.A2 R8_D.2 U2_D.2 | length 1824.2
  Top w6.3: 5068.7,-774.68 5068.7,-752.74 ; 5068.7,-774.68 5095.32,-801.3 ; 5068.7,-774.68 5068.7,-752.74 ; 5068.7,-774.68 5095.32,-801.3 ; 5068.7,-752.74 5090.32,-731.12 ; 5068.7,-752.74 5090.32,-731.12 ; 5090.32,-731.12 U2_D.2@5132.03,-731.12 ; 5090.32,-731.12 U2_D.2@5132.03,-731.12 ; 5095.32,-801.3 5199.68,-801.3 ; 5095.32,-801.3 5199.68,-801.3 ; U2_D.2@5132.03,-731.12 U2_D.2@5139.17,-723.98 U2_D.2@5132.03,-731.12 ; 5199.68,-801.3 5260.33,-740.65 ; 5199.68,-801.3 5260.33,-740.65 ; 5260.33,-740.65 5325.06,-740.65 ; 5260.33,-740.65 5325.06,-740.65 ; 5325.06,-740.65 R8_D.2@5345,-760.59 ; 5325.06,-740.65 R8_D.2@5345,-760.59 ; R8_D.2@5345,-760.59 5364.94,-740.65 ; R8_D.2@5345,-760.59 5364.94,-740.65 ; 5364.94,-740.65 5409.62,-740.65 ; 5364.94,-740.65 5409.62,-740.65 ; 5409.62,-740.65 5511.01,-639.26 ; 5409.62,-740.65 5511.01,-639.26 ; 5511.01,-639.26 5511.01,-488.99 ; 5511.01,-639.26 5511.01,-488.99 ; 5511.01,-488.99 5565.61,-434.39 ; 5511.01,-488.99 5565.61,-434.39 ; 5565.61,-434.39 J10_D.A2@5602.97,-434.39 ; 5565.61,-434.39 J10_D.A2@5602.97,-434.39 ; J10_D.A2@5602.97,-434.39 J10_D.A2@5607.17,-438.58 J10_D.A2@5602.97,-434.39
MISO2_E_N: J10_E.A3 R8_E.1 U2_E.1 | length 1749.3
  Top w6.3: 5080,-70 5080,-57.42 ; 5080,-70 5100,-90 ; 5080,-70 5080,-57.42 ; 5080,-70 5100,-90 ; 5080,-57.42 5095,-42.42 ; 5080,-57.42 5095,-42.42 ; 5095,-42.42 U2_E.1@5132.03,-42.42 ; 5095,-42.42 U2_E.1@5132.03,-42.42 ; 5100,-90 5195,-90 ; 5100,-90 5195,-90 ; U2_E.1@5132.03,-42.42 U2_E.1@5139.17,-49.57 U2_E.1@5132.03,-42.42 ; 5195,-90 5255.65,-29.35 ; 5195,-90 5255.65,-29.35 ; 5255.65,-29.35 5325.06,-29.35 ; 5255.65,-29.35 5325.06,-29.35 ; 5325.06,-29.35 R8_E.1@5345,-9.41 ; 5325.06,-29.35 R8_E.1@5345,-9.41 ; R8_E.1@5345,-9.41 5364.94,-29.35 ; R8_E.1@5345,-9.41 5364.94,-29.35 ; 5364.94,-29.35 5404.94,-29.35 ; 5364.94,-29.35 5404.94,-29.35 ; 5404.94,-29.35 5499.71,65.42 ; 5404.94,-29.35 5499.71,65.42 ; 5499.71,65.42 5499.71,215.7 ; 5499.71,65.42 5499.71,215.7 ; 5499.71,215.7 5560.93,276.91 ; 5499.71,215.7 5560.93,276.91 ; 5560.93,276.91 J10_E.A3@5602.97,276.91 ; 5560.93,276.91 J10_E.A3@5602.97,276.91 ; J10_E.A3@5602.97,276.91 J10_E.A3@5607.17,281.1 J10_E.A3@5602.97,276.91
MISO2_E_P: J10_E.A2 R8_E.2 U2_E.2 | length 1824.2
  Top w6.3: 5068.7,-74.68 5068.7,-52.74 ; 5068.7,-74.68 5095.32,-101.3 ; 5068.7,-74.68 5068.7,-52.74 ; 5068.7,-74.68 5095.32,-101.3 ; 5068.7,-52.74 5090.32,-31.12 ; 5068.7,-52.74 5090.32,-31.12 ; 5090.32,-31.12 U2_E.2@5132.03,-31.12 ; 5090.32,-31.12 U2_E.2@5132.03,-31.12 ; 5095.32,-101.3 5199.68,-101.3 ; 5095.32,-101.3 5199.68,-101.3 ; U2_E.2@5132.03,-31.12 U2_E.2@5139.17,-23.98 U2_E.2@5132.03,-31.12 ; 5199.68,-101.3 5260.33,-40.65 ; 5199.68,-101.3 5260.33,-40.65 ; 5260.33,-40.65 5325.06,-40.65 ; 5260.33,-40.65 5325.06,-40.65 ; 5325.06,-40.65 R8_E.2@5345,-60.59 ; 5325.06,-40.65 R8_E.2@5345,-60.59 ; R8_E.2@5345,-60.59 5364.94,-40.65 ; R8_E.2@5345,-60.59 5364.94,-40.65 ; 5364.94,-40.65 5409.62,-40.65 ; 5364.94,-40.65 5409.62,-40.65 ; 5409.62,-40.65 5511.01,60.74 ; 5409.62,-40.65 5511.01,60.74 ; 5511.01,60.74 5511.01,211.01 ; 5511.01,60.74 5511.01,211.01 ; 5511.01,211.01 5565.61,265.61 ; 5511.01,211.01 5565.61,265.61 ; 5565.61,265.61 J10_E.A2@5602.97,265.61 ; 5565.61,265.61 J10_E.A2@5602.97,265.61 ; J10_E.A2@5602.97,265.61 J10_E.A2@5607.17,261.42 J10_E.A2@5602.97,265.61
MISO2_F_N: J10_F.A3 R8_F.1 U2_F.1 | length 874.6
  Top w6.3: U2_F.1@5139.17,650.43 5132.03,657.58 5095,657.58 5080,642.58 5080,630 5100,610 5195,610 5255.65,670.65 5325.06,670.65 R8_F.1@5345,690.59 5364.94,670.65 5404.94,670.65 5499.71,765.42 5499.71,915.7 5560.93,976.91 5602.97,976.91 J10_F.A3@5607.17,981.1
MISO2_F_P: J10_F.A2 R8_F.2 U2_F.2 | length 912.1
  Top w6.3: U2_F.2@5139.17,676.02 5132.03,668.88 5090.32,668.88 5068.7,647.26 5068.7,625.32 5095.32,598.7 5199.68,598.7 5260.33,659.35 5325.06,659.35 R8_F.2@5345,639.41 5364.94,659.35 5409.62,659.35 5511.01,760.74 5511.01,911.01 5565.61,965.61 5602.97,965.61 J10_F.A2@5607.17,961.42
MISO2_G_N: J10_G.A3 R8_G.1 U2_G.1 | length 874.6
  Top w6.3: U2_G.1@5139.17,1350.43 5132.03,1357.58 5095,1357.58 5080,1342.58 5080,1330 5100,1310 5195,1310 5255.65,1370.65 5325.06,1370.65 R8_G.1@5345,1390.59 5364.94,1370.65 5404.94,1370.65 5499.71,1465.42 5499.71,1615.7 5560.93,1676.91 5602.97,1676.91 J10_G.A3@5607.17,1681.1
MISO2_G_P: J10_G.A2 R8_G.2 U2_G.2 | length 912.1
  Top w6.3: U2_G.2@5139.17,1376.02 5132.03,1368.88 5090.32,1368.88 5068.7,1347.26 5068.7,1325.32 5095.32,1298.7 5199.68,1298.7 5260.33,1359.35 5325.06,1359.35 R8_G.2@5345,1339.41 5364.94,1359.35 5409.62,1359.35 5511.01,1460.74 5511.01,1611.01 5565.61,1665.61 5602.97,1665.61 J10_G.A2@5607.17,1661.42
MISO2_H_N: J10_H.A3 R8_H.1 U2_H.1 | length 874.6
  Top w6.3: U2_H.1@5139.17,2050.43 5132.03,2057.58 5095,2057.58 5080,2042.58 5080,2030 5100,2010 5195,2010 5255.65,2070.65 5325.06,2070.65 R8_H.1@5345,2090.59 5364.94,2070.65 5404.94,2070.65 5499.71,2165.42 5499.71,2315.7 5560.93,2376.91 5602.97,2376.91 J10_H.A3@5607.17,2381.1
MISO2_H_P: J10_H.A2 R8_H.2 U2_H.2 | length 912.1
  Top w6.3: U2_H.2@5139.17,2076.02 5132.03,2068.88 5090.32,2068.88 5068.7,2047.26 5068.7,2025.32 5095.32,1998.7 5199.68,1998.7 5260.33,2059.35 5325.06,2059.35 R8_H.2@5345,2039.41 5364.94,2059.35 5409.62,2059.35 5511.01,2160.74 5511.01,2311.01 5565.61,2365.61 5602.97,2365.61 J10_H.A2@5607.17,2361.42
MISO_A1: J6.24 U2_A.10 | length 4141.7
  Top w8: J6.24@1893.19,-908.98 1893.19,-1158.19 2525,-1790 3105,-1790 3605,-2290 v2(4320,-2290) ; v2(4320,-2696.02) U2_A.10@4910.83,-2696.02
  Bottom w8: v2(4320,-2696.02) v2(4320,-2290)
MISO_A2: J6.26 U2_A.11 | length 4144.5
  Top w8: J6.26@1924.69,-908.98 1924.69,-1133.16 2551.53,-1760 3120,-1760 3610,-2250 v2(4395,-2250) ; v2(4395,-2721.61) U2_A.11@4910.83,-2721.61
  Bottom w8: v2(4395,-2721.61) v2(4395,-2250)
MISO_B1: J6.38 U2_B.10 | length 3612.2
  Top w8: J6.38@2113.66,-908.98 2113.66,-1103.66 2578,-1568 v2(4320,-1568) ; v2(4320,-1996.02) U2_B.10@4910.83,-1996.02
  Bottom w8: v2(4320,-1996.02) 4320,-1590 v2(4320,-1568)
MISO_B2: J6.40 U2_B.11 | length 3613
  Top w8: J6.40@2145.16,-908.98 2145.16,-1085.16 2598,-1538 v2(4395,-1538) ; v2(4395,-2021.61) U2_B.11@4910.83,-2021.61
  Bottom w8: v2(4395,-2021.61) 4395,-1550 v2(4395,-1538)
MISO_C1: J6.50 U2_C.10 | length 3508.8
  Top w8: J6.50@2302.64,-908.98 2302.64,-1040.04 2666.46,-1403.86 3746.14,-1403.86 4260,-890 v2(4320,-890) ; v2(4320,-1296.02) U2_C.10@4910.83,-1296.02
  Bottom w8: v2(4320,-1296.02) v2(4320,-890)
MISO_C2: J6.52 U2_C.11 | length 3524
  Top w8: J6.52@2334.13,-908.98 2334.13,-1021.97 2686.02,-1373.86 3726.14,-1373.86 4250,-850 v2(4395,-850) ; v2(4395,-1321.61) U2_C.11@4910.83,-1321.61
  Bottom w8: v2(4395,-1321.61) v2(4395,-850)
MISO_D1: J6.64 U2_D.10 | length 3505.1
  Top w8: J6.64@2523.11,-908.98 2523.11,-1030.99 2722.12,-1230 3410,-1230 4265,-375 4265,-245 v2(4320,-190) ; v2(4320,-596.02) U2_D.10@4910.83,-596.02
  Bottom w8: v2(4320,-596.02) v2(4320,-190)
MISO_D2: J6.66 U2_D.11 | length 3520.6
  Top w8: J6.66@2554.61,-908.98 2554.61,-1019.61 2735,-1200 3385,-1200 4230,-355 4230,-231.24 4311.24,-150 v2(4395,-150) ; v2(4395,-621.61) U2_D.11@4910.83,-621.61
  Bottom w8: v2(4395,-621.61) v2(4395,-150)
MISO_E1: J6.76 U2_E.10 | length 3643.5
  Top w8: J6.76@2712.09,-908.98 2712.09,-982.01 2810.08,-1080 3185,-1080 3920,-345 3920,110 v2(4320,510) ; v2(4320,103.98) U2_E.10@4910.83,103.98
  Bottom w8: v2(4320,103.98) v2(4320,510)
MISO_E2: J6.79 U2_E.11 | length 3375.6
  Top w8: J6.79@2775.08,-665.98 3549.02,-665.98 3885,-330 3885,121.61 4313.39,550 v2(4395,550) ; v2(4395,78.39) U2_E.11@4910.83,78.39
  Bottom w8: v2(4395,78.39) v2(4395,550)
MISO_F1: J6.69 U2_F.10 | length 3000.9
  Top w8: J6.69@2617.6,-665.98 2617.6,-568.86 2736.46,-450 3014,-450 4199,735 v2(4265,735) ; v2(4265,805) 4266.02,803.98 U2_F.10@4910.83,803.98
  Bottom w8: v2(4265,735) v2(4265,805)
MISO_F2: J6.67 U2_F.11 | length 2990.2
  Top w8: J6.67@2586.1,-665.98 2586.1,-551.28 2722.39,-415 2995,-415 4188.39,778.39 U2_F.11@4910.83,778.39
MISO_G1: J6.57 U2_G.10 | length 3652.6
  Top w8: J6.57@2428.62,-665.98 2428.62,-478.77 2662.39,-245 2790,-245 4062.59,1027.59 4062.59,1232.59 v2(4265,1435) ; v2(4265,1505) 4266.02,1503.98 U2_G.10@4910.83,1503.98
  Bottom w8: v2(4265,1435) v2(4265,1505)
MISO_G2: J6.53 U2_G.11 | length 3679.2
  Top w8: J6.53@2365.63,-665.98 2365.63,-481.37 2637,-210 2760,-210 4025,1055 4025,1290 4213.39,1478.39 U2_G.11@4910.83,1478.39
MISO_H1: J6.43 U2_H.10 | length 4401.6
  Top w8: J6.43@2208.15,-665.98 2208.15,-346.49 2519.64,-35 2575,-35 3783,1173 3783,1653 v2(4265,2135) ; v2(4265,2205) 4266.02,2203.98 U2_H.10@4910.83,2203.98
  Bottom w8: v2(4265,2135) v2(4265,2205)
MISO_H2: J6.41 U2_H.11 | length 4416.5
  Top w8: J6.41@2176.65,-665.98 2176.65,-320.35 2497,0 2550,0 3748,1198 3748,1713 4213.39,2178.39 U2_H.11@4910.83,2178.39
MOSI_A: J6.20 U1_A.2 | length 3810.1
  Top w8: J6.20@1830.2,-908.98 1830.2,-1148.67 2501.53,-1820 3095,-1820 3606.02,-2331.02 4265,-2331.02 U1_A.2@4910.83,-2331.02
MOSI_A_N: J10_A.B3 U1_A.16 | length 721.9
  Top w6.3: U1_A.16@5139.17,-2305.43 5132.03,-2312.58 5100,-2312.58 5085.64,-2298.21 5085.64,-2287.4 5099.81,-2273.23 5161.65,-2273.23 v1(5165,-2276.58) ; v1(5640,-2390.1) 5643.35,-2386.75 5669.9,-2386.75 J10_A.B3@5674.09,-2390.94
  Bottom w6.3: v1(5165,-2276.58) 5168.35,-2273.23 5190,-2273.23 5254.14,-2337.37 5294.55,-2337.37 5550.93,-2337.37 5600.32,-2386.75 5636.65,-2386.75 v1(5640,-2390.1)
MOSI_A_P: J10_A.B2 U1_A.15 | length 759.3
  Top w6.3: U1_A.15@5139.17,-2331.02 5132.03,-2323.88 5095.32,-2323.88 5074.33,-2302.9 5074.33,-2282.72 5095.13,-2261.93 5161.65,-2261.93 v1(5165,-2258.58) ; v1(5640,-2372.1) 5643.35,-2375.45 5669.9,-2375.45 J10_A.B2@5674.09,-2371.26
  Bottom w6.3: v1(5165,-2258.58) 5168.35,-2261.93 5194.68,-2261.93 5258.82,-2326.07 5540,-2326.07 5555.62,-2326.07 5605,-2375.45 5636.65,-2375.45 v1(5640,-2372.1)
MOSI_B: J6.32 U1_B.2 | length 3280.8
  Top w8: J6.32@2019.17,-908.98 2019.17,-1062.65 2587.55,-1631.02 4650.5,-1631.02 4724.5,-1631.02 U1_B.2@4910.83,-1631.02
MOSI_B_N: J10_B.B3 U1_B.16 | length 1443.8
  Top w6.3: 5085.64,-1598.21 5100,-1612.58 ; 5085.64,-1598.21 5085.64,-1587.4 ; 5085.64,-1598.21 5085.64,-1587.4 ; 5085.64,-1598.21 5100,-1612.58 ; 5085.64,-1587.4 5099.81,-1573.23 ; 5085.64,-1587.4 5099.81,-1573.23 ; 5099.81,-1573.23 v1@5161.65,-1573.23 ; 5099.81,-1573.23 v1@5161.65,-1573.23 ; 5100,-1612.58 U1_B.16@5132.03,-1612.58 ; 5100,-1612.58 U1_B.16@5132.03,-1612.58 ; U1_B.16@5132.03,-1612.58 U1_B.16@5139.17,-1605.43 U1_B.16@5132.03,-1612.58 ; v1@5161.65,-1573.23 v1(5165,-1576.58) v1@5161.65,-1573.23 ; v1@5643.35,-1686.75 v1(5640,-1690.1) v1@5643.35,-1686.75 ; v1@5643.35,-1686.75 J10_B.B3@5669.9,-1686.75 ; v1@5643.35,-1686.75 J10_B.B3@5669.9,-1686.75 ; J10_B.B3@5669.9,-1686.75 J10_B.B3@5674.09,-1690.94 J10_B.B3@5669.9,-1686.75
  Bottom w6.3: v1@5168.35,-1573.23 v1(5165,-1576.58) v1@5168.35,-1573.23 ; v1@5168.35,-1573.23 5190,-1573.23 ; v1@5168.35,-1573.23 5190,-1573.23 ; 5190,-1573.23 5254.14,-1637.37 ; 5190,-1573.23 5254.14,-1637.37 ; 5254.14,-1637.37 5294.55,-1637.37 ; 5254.14,-1637.37 5294.55,-1637.37 ; 5294.55,-1637.37 5550.93,-1637.37 ; 5294.55,-1637.37 5550.93,-1637.37 ; 5550.93,-1637.37 5600.32,-1686.75 ; 5550.93,-1637.37 5600.32,-1686.75 ; 5600.32,-1686.75 v1@5636.65,-1686.75 ; 5600.32,-1686.75 v1@5636.65,-1686.75 ; v1@5636.65,-1686.75 v1(5640,-1690.1) v1@5636.65,-1686.75
MOSI_B_P: J10_B.B2 U1_B.15 | length 1518.7
  Top w6.3: 5074.33,-1602.9 5095.32,-1623.88 ; 5074.33,-1602.9 5074.33,-1582.72 ; 5074.33,-1602.9 5074.33,-1582.72 ; 5074.33,-1602.9 5095.32,-1623.88 ; 5074.33,-1582.72 5095.13,-1561.93 ; 5074.33,-1582.72 5095.13,-1561.93 ; 5095.13,-1561.93 v1@5161.65,-1561.93 ; 5095.13,-1561.93 v1@5161.65,-1561.93 ; 5095.32,-1623.88 U1_B.15@5132.03,-1623.88 ; 5095.32,-1623.88 U1_B.15@5132.03,-1623.88 ; U1_B.15@5132.03,-1623.88 U1_B.15@5139.17,-1631.02 U1_B.15@5132.03,-1623.88 ; v1@5161.65,-1561.93 v1(5165,-1558.58) v1@5161.65,-1561.93 ; v1@5643.35,-1675.45 J10_B.B2@5669.9,-1675.45 ; v1@5643.35,-1675.45 v1(5640,-1672.1) v1@5643.35,-1675.45 ; v1@5643.35,-1675.45 J10_B.B2@5669.9,-1675.45 ; J10_B.B2@5669.9,-1675.45 J10_B.B2@5674.09,-1671.26 J10_B.B2@5669.9,-1675.45
  Bottom w6.3: v1@5168.35,-1561.93 v1(5165,-1558.58) v1@5168.35,-1561.93 ; v1@5168.35,-1561.93 5194.68,-1561.93 ; v1@5168.35,-1561.93 5194.68,-1561.93 ; 5194.68,-1561.93 5258.82,-1626.07 ; 5194.68,-1561.93 5258.82,-1626.07 ; 5258.82,-1626.07 5540,-1626.07 ; 5258.82,-1626.07 5540,-1626.07 ; 5540,-1626.07 5555.62,-1626.07 ; 5540,-1626.07 5555.62,-1626.07 ; 5555.62,-1626.07 5605,-1675.45 ; 5555.62,-1626.07 5605,-1675.45 ; 5605,-1675.45 v1@5636.65,-1675.45 ; 5605,-1675.45 v1@5636.65,-1675.45 ; v1@5636.65,-1675.45 v1(5640,-1672.1) v1@5636.65,-1675.45
MOSI_C: J6.46 U1_C.2 | length 3166.9
  Top w8: J6.46@2239.65,-908.98 2239.65,-1028.54 2644.96,-1433.86 3762.17,-1433.86 4265,-931.02 U1_C.2@4910.83,-931.02
MOSI_C_N: J10_C.B3 U1_C.16 | length 1443.8
  Top w6.3: 5085.64,-898.21 5100,-912.58 ; 5085.64,-898.21 5085.64,-887.4 ; 5085.64,-898.21 5100,-912.58 ; 5085.64,-898.21 5085.64,-887.4 ; 5085.64,-887.4 5099.81,-873.23 ; 5085.64,-887.4 5099.81,-873.23 ; 5099.81,-873.23 v1@5161.65,-873.23 ; 5099.81,-873.23 v1@5161.65,-873.23 ; 5100,-912.58 U1_C.16@5132.03,-912.58 ; 5100,-912.58 U1_C.16@5132.03,-912.58 ; U1_C.16@5132.03,-912.58 U1_C.16@5139.17,-905.43 U1_C.16@5132.03,-912.58 ; v1@5161.65,-873.23 v1(5165,-876.58) v1@5161.65,-873.23 ; v1@5643.35,-986.75 v1(5640,-990.1) v1@5643.35,-986.75 ; v1@5643.35,-986.75 J10_C.B3@5669.9,-986.75 ; v1@5643.35,-986.75 J10_C.B3@5669.9,-986.75 ; J10_C.B3@5669.9,-986.75 J10_C.B3@5674.09,-990.94 J10_C.B3@5669.9,-986.75
  Bottom w6.3: v1@5168.35,-873.23 v1(5165,-876.58) v1@5168.35,-873.23 ; v1@5168.35,-873.23 5190,-873.23 ; v1@5168.35,-873.23 5190,-873.23 ; 5190,-873.23 5254.14,-937.37 ; 5190,-873.23 5254.14,-937.37 ; 5254.14,-937.37 5294.55,-937.37 ; 5254.14,-937.37 5294.55,-937.37 ; 5294.55,-937.37 5550.93,-937.37 ; 5294.55,-937.37 5550.93,-937.37 ; 5550.93,-937.37 5600.32,-986.75 ; 5550.93,-937.37 5600.32,-986.75 ; 5600.32,-986.75 v1@5636.65,-986.75 ; 5600.32,-986.75 v1@5636.65,-986.75 ; v1@5636.65,-986.75 v1(5640,-990.1) v1@5636.65,-986.75
MOSI_C_P: J10_C.B2 U1_C.15 | length 1518.7
  Top w6.3: 5074.33,-902.9 5095.32,-923.88 ; 5074.33,-902.9 5074.33,-882.72 ; 5074.33,-902.9 5095.32,-923.88 ; 5074.33,-902.9 5074.33,-882.72 ; 5074.33,-882.72 5095.13,-861.93 ; 5074.33,-882.72 5095.13,-861.93 ; 5095.13,-861.93 v1@5161.65,-861.93 ; 5095.13,-861.93 v1@5161.65,-861.93 ; 5095.32,-923.88 U1_C.15@5132.03,-923.88 ; 5095.32,-923.88 U1_C.15@5132.03,-923.88 ; U1_C.15@5132.03,-923.88 U1_C.15@5139.17,-931.02 U1_C.15@5132.03,-923.88 ; v1@5161.65,-861.93 v1(5165,-858.58) v1@5161.65,-861.93 ; v1@5643.35,-975.45 J10_C.B2@5669.9,-975.45 ; v1@5643.35,-975.45 v1(5640,-972.1) v1@5643.35,-975.45 ; v1@5643.35,-975.45 J10_C.B2@5669.9,-975.45 ; J10_C.B2@5669.9,-975.45 J10_C.B2@5674.09,-971.26 J10_C.B2@5669.9,-975.45
  Bottom w6.3: v1@5168.35,-861.93 v1(5165,-858.58) v1@5168.35,-861.93 ; v1@5168.35,-861.93 5194.68,-861.93 ; v1@5168.35,-861.93 5194.68,-861.93 ; 5194.68,-861.93 5258.82,-926.07 ; 5194.68,-861.93 5258.82,-926.07 ; 5258.82,-926.07 5540,-926.07 ; 5258.82,-926.07 5540,-926.07 ; 5540,-926.07 5555.62,-926.07 ; 5540,-926.07 5555.62,-926.07 ; 5555.62,-926.07 5605,-975.45 ; 5555.62,-926.07 5605,-975.45 ; 5605,-975.45 v1@5636.65,-975.45 ; 5605,-975.45 v1@5636.65,-975.45 ; v1@5636.65,-975.45 v1(5640,-972.1) v1@5636.65,-975.45
MOSI_D: J6.60 U1_D.2 | length 3081.6
  Top w8: J6.60@2460.12,-908.98 2460.12,-1010.12 2710,-1260 3430,-1260 4164.41,-525.59 4458.98,-231.02 U1_D.2@4910.83,-231.02
MOSI_D_N: J10_D.B3 U1_D.16 | length 1443.8
  Top w6.3: 5085.64,-198.21 5100,-212.58 ; 5085.64,-198.21 5085.64,-187.4 ; 5085.64,-198.21 5100,-212.58 ; 5085.64,-198.21 5085.64,-187.4 ; 5085.64,-187.4 5099.81,-173.23 ; 5085.64,-187.4 5099.81,-173.23 ; 5099.81,-173.23 v1@5161.65,-173.23 ; 5099.81,-173.23 v1@5161.65,-173.23 ; 5100,-212.58 U1_D.16@5132.03,-212.58 ; 5100,-212.58 U1_D.16@5132.03,-212.58 ; U1_D.16@5132.03,-212.58 U1_D.16@5139.17,-205.43 U1_D.16@5132.03,-212.58 ; v1@5161.65,-173.23 v1(5165,-176.58) v1@5161.65,-173.23 ; v1@5643.35,-286.75 v1(5640,-290.1) v1@5643.35,-286.75 ; v1@5643.35,-286.75 J10_D.B3@5669.9,-286.75 ; v1@5643.35,-286.75 J10_D.B3@5669.9,-286.75 ; J10_D.B3@5669.9,-286.75 J10_D.B3@5674.09,-290.94 J10_D.B3@5669.9,-286.75
  Bottom w6.3: v1@5168.35,-173.23 v1(5165,-176.58) v1@5168.35,-173.23 ; v1@5168.35,-173.23 5190,-173.23 ; v1@5168.35,-173.23 5190,-173.23 ; 5190,-173.23 5254.14,-237.37 ; 5190,-173.23 5254.14,-237.37 ; 5254.14,-237.37 5294.55,-237.37 ; 5254.14,-237.37 5294.55,-237.37 ; 5294.55,-237.37 5550.93,-237.37 ; 5294.55,-237.37 5550.93,-237.37 ; 5550.93,-237.37 5600.32,-286.75 ; 5550.93,-237.37 5600.32,-286.75 ; 5600.32,-286.75 v1@5636.65,-286.75 ; 5600.32,-286.75 v1@5636.65,-286.75 ; v1@5636.65,-286.75 v1(5640,-290.1) v1@5636.65,-286.75
MOSI_D_P: J10_D.B2 U1_D.15 | length 1518.7
  Top w6.3: 5074.33,-202.9 5095.32,-223.88 ; 5074.33,-202.9 5074.33,-182.72 ; 5074.33,-202.9 5095.32,-223.88 ; 5074.33,-202.9 5074.33,-182.72 ; 5074.33,-182.72 5095.13,-161.93 ; 5074.33,-182.72 5095.13,-161.93 ; 5095.13,-161.93 v1@5161.65,-161.93 ; 5095.13,-161.93 v1@5161.65,-161.93 ; 5095.32,-223.88 U1_D.15@5132.03,-223.88 ; 5095.32,-223.88 U1_D.15@5132.03,-223.88 ; U1_D.15@5132.03,-223.88 U1_D.15@5139.17,-231.02 U1_D.15@5132.03,-223.88 ; v1@5161.65,-161.93 v1(5165,-158.58) v1@5161.65,-161.93 ; v1@5643.35,-275.45 J10_D.B2@5669.9,-275.45 ; v1@5643.35,-275.45 v1(5640,-272.1) v1@5643.35,-275.45 ; v1@5643.35,-275.45 J10_D.B2@5669.9,-275.45 ; J10_D.B2@5669.9,-275.45 J10_D.B2@5674.09,-271.26 J10_D.B2@5669.9,-275.45
  Bottom w6.3: v1@5168.35,-161.93 v1(5165,-158.58) v1@5168.35,-161.93 ; v1@5168.35,-161.93 5194.68,-161.93 ; v1@5168.35,-161.93 5194.68,-161.93 ; 5194.68,-161.93 5258.82,-226.07 ; 5194.68,-161.93 5258.82,-226.07 ; 5258.82,-226.07 5540,-226.07 ; 5258.82,-226.07 5540,-226.07 ; 5540,-226.07 5555.62,-226.07 ; 5540,-226.07 5555.62,-226.07 ; 5555.62,-226.07 5605,-275.45 ; 5555.62,-226.07 5605,-275.45 ; 5605,-275.45 v1@5636.65,-275.45 ; 5605,-275.45 v1@5636.65,-275.45 ; v1@5636.65,-275.45 v1(5640,-272.1) v1@5636.65,-275.45
MOSI_E: J6.72 U1_E.2 | length 3312.8
  Top w8: J6.72@2649.09,-908.98 2649.09,-989.09 2770,-1110 3205,-1110 3955,-360 3955,95.59 4328.39,468.98 U1_E.2@4910.83,468.98
MOSI_E_N: J10_E.B3 U1_E.16 | length 1443.8
  Top w6.3: 5085.64,501.79 5100,487.42 ; 5085.64,501.79 5085.64,512.6 ; 5085.64,501.79 5100,487.42 ; 5085.64,501.79 5085.64,512.6 ; 5085.64,512.6 5099.81,526.77 ; 5085.64,512.6 5099.81,526.77 ; 5099.81,526.77 v1@5161.65,526.77 ; 5099.81,526.77 v1@5161.65,526.77 ; 5100,487.42 U1_E.16@5132.03,487.42 ; 5100,487.42 U1_E.16@5132.03,487.42 ; U1_E.16@5132.03,487.42 U1_E.16@5139.17,494.57 U1_E.16@5132.03,487.42 ; v1@5161.65,526.77 v1(5165,523.42) v1@5161.65,526.77 ; v1@5643.35,413.25 v1(5640,409.9) v1@5643.35,413.25 ; v1@5643.35,413.25 J10_E.B3@5669.9,413.25 ; v1@5643.35,413.25 J10_E.B3@5669.9,413.25 ; J10_E.B3@5669.9,413.25 J10_E.B3@5674.09,409.06 J10_E.B3@5669.9,413.25
  Bottom w6.3: v1@5168.35,526.77 v1(5165,523.42) v1@5168.35,526.77 ; v1@5168.35,526.77 5190,526.77 ; v1@5168.35,526.77 5190,526.77 ; 5190,526.77 5254.14,462.63 ; 5190,526.77 5254.14,462.63 ; 5254.14,462.63 5294.55,462.63 ; 5254.14,462.63 5294.55,462.63 ; 5294.55,462.63 5550.93,462.63 ; 5294.55,462.63 5550.93,462.63 ; 5550.93,462.63 5600.32,413.25 ; 5550.93,462.63 5600.32,413.25 ; 5600.32,413.25 v1@5636.65,413.25 ; 5600.32,413.25 v1@5636.65,413.25 ; v1@5636.65,413.25 v1(5640,409.9) v1@5636.65,413.25